# Altium PCB moveWiFi.PcbDoc
Units mil, origin at the board's own origin, x right, y up, seen from the top; angles counter-clockwise.
Board outline 2297.03 x 1980.03 mil, 2 copper layers (Top Layer, Bottom Layer); 64 components, 24 nets, 322 pads, 42 vias.
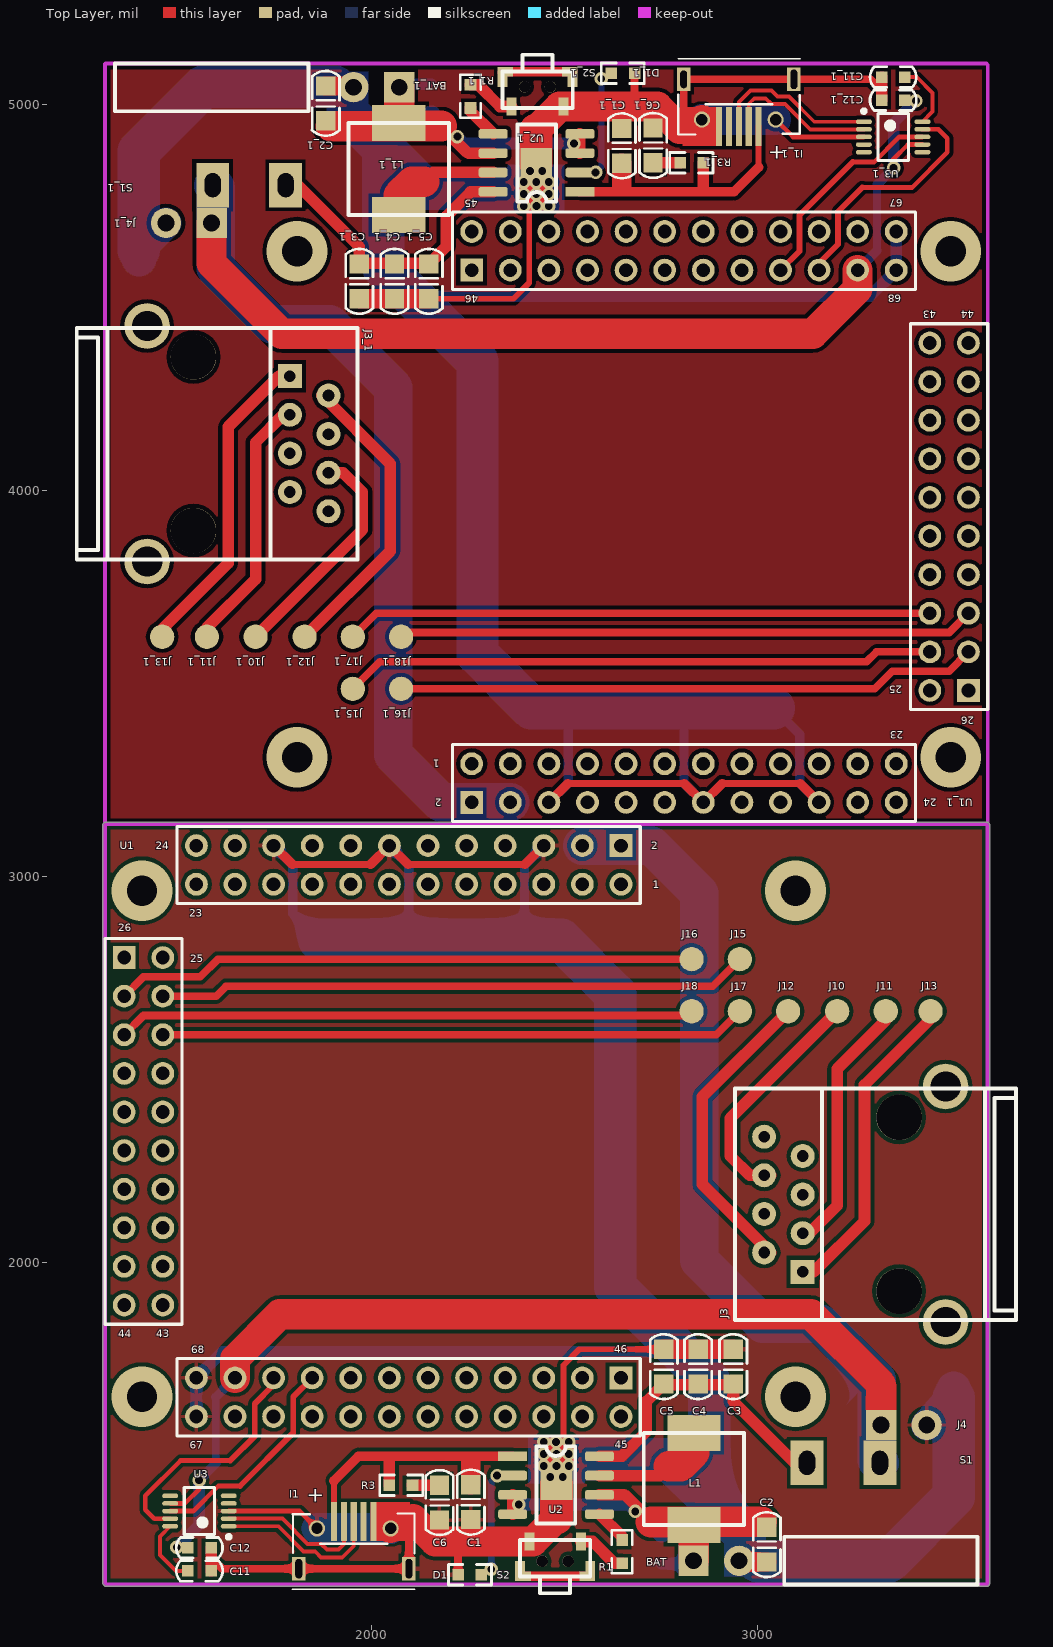
[diagram p0: Top Layer view]
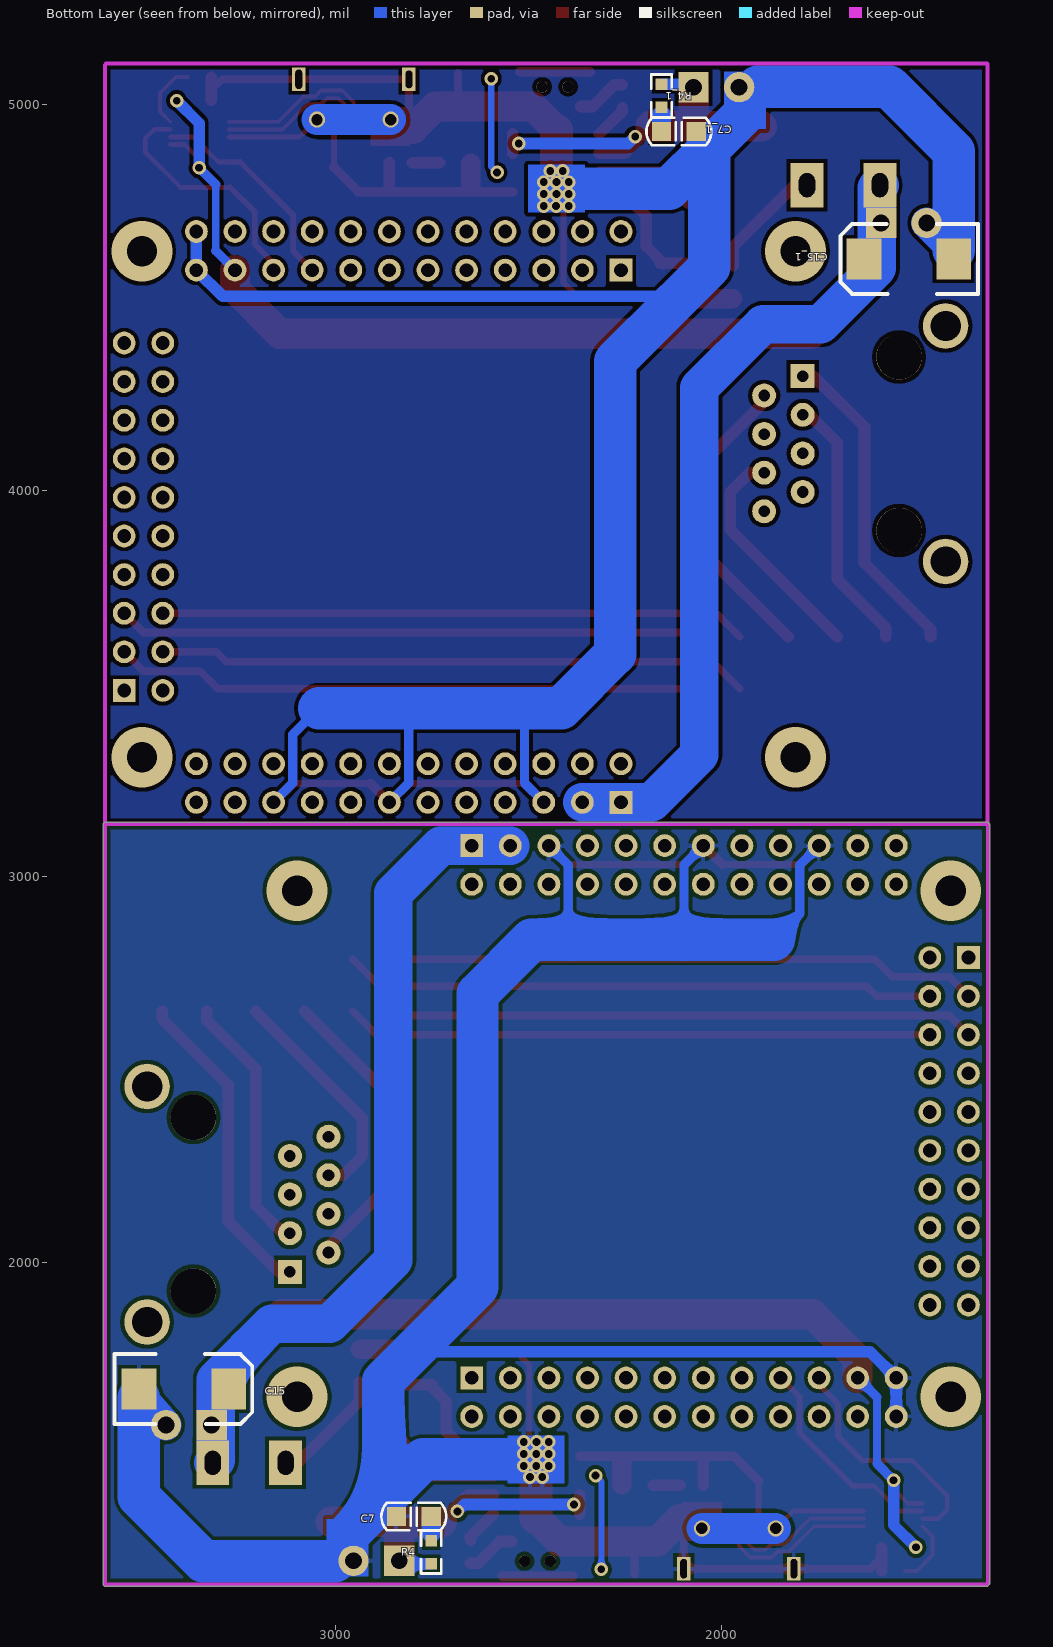
[diagram p1: Bottom Layer view, seen from below]

## Layer stack, top to bottom
Top Solder: solder mask 0.4, Solder Resist, Dk 3.5
Top Layer: signal copper 1.4
Dielectric 1: dielectric 12.6, FR-4, Dk 4.8
Bottom Layer: signal copper 1.4
Bottom Solder: solder mask 0.4, Solder Resist, Dk 3.5

## Board outline
1306.47,1164.44 cw(c1310,1168) 1304.98,1168 1304.98,3133 cw(c1310,3133) 1307.6,3137.4 cw(c1312,3135) 1312,3140.01 3595,3140.01 cw(c3595,3135) 3598.56,3138.53 3598.55,3138.55 3600.55,3136.55 3600.53,3136.56 cw(c3597,3133) 3602.01,3133 3602.01,1166 cw(c3597,1166) 3600.53,1162.44 3600.55,1162.45 3599.55,1161.45 3599.56,1161.47 cw(c3596,1165) 3596,1159.98 1313,1159.98 cw(c1313,1165) 1309.44,1161.47 1309.45,1161.45

## Design rules (kind name [scope] priority, off if disabled: settings)
Clearance [All] p1: gap=7 ignorepadtopadclearanceinfootprint=FALSE
ComponentClearance [All] p1: gap=0 collisioncheckmode=3 verticalgap=0 showdistances=FALSE
DiffPairsRouting [All] p1: maxlimit=10 minlimit=8 mostfreqgap=10 toplayer_minwidth=15 toplayer_maxwidth=15 toplayer_prefwidth=15 bottomlayer_minwidth=15 bottomlayer_maxwidth=15 bottomlayer_prefwidth=15 maxuncoupledlength=500
HoleSize [All] p1: absolutevalues=TRUE maxlimit=100 minlimit=12 maxpercent=80.000 minpercent=20.000
NetAntennae [All] p1: netantennaetolerance=10
PolygonConnect [All] p1: connectstyle=Relief reliefconductorwidth=10 reliefentries=4 polygonreliefangle="90 Angle" airgapwidth=10
RoutingVias [All] p1: holewidth=28 width=50 viastyle="Through Hole" minholewidth=28 minwidth=50 maxholewidth=28 maxwidth=50
SolderMaskExpansion [All] p1: expansion=4
Width [All] p1: maxlimit=200 minlimit=8 preferedwidth=10 minimp=50.000000 maximp=50.000000 favimp=50.000000
26 further rules are at their usual default settings.

## Classes and differential pairs
component class moveWiFi: BAT C1 C2 C3 C4 C5 C6 C7 C11 C12 C15 D1 I1 J3 J4 J10 J11 J12 J13 J15 J16 J17 J18 L1 R1 R3 R4 S1 S2 U1 U2 U3

## Components (designator, comment, footprint, x,y, rotation, side; value= is the part's Value field where it differs from the comment)
BAT "Power" "Power 2" 2835,1226 r0 top (schematic designator J2)
BAT_1 "Power" "Power 2" 2072.29,5044.12 r180 top (schematic designator J2)
C1 "Cap Semi" C0805 2258,1333 r90 top value=10uF
C1_1 "Cap Semi" C0805 2649.29,4937.12 r270 top value=10uF (schematic designator C1)
C2 "Cap Semi" C0805 3025,1223 r90 top value=10uF
C2_1 "Cap Semi" C0805 1882.29,5047.12 r270 top value=10uF (schematic designator C2)
C3 "Cap Semi" C0805 2938,1774 r270 top value=22uF
C3_1 "Cap Semi" C0805 1969.29,4496.12 r90 top value=22uF (schematic designator C3)
C4 "Cap Semi" C0805 2847,1774 r270 top value=22uF
C4_1 "Cap Semi" C0805 2060.29,4496.12 r90 top value=22uF (schematic designator C4)
C5 "Cap Semi" C0805 2758,1774 r270 top value=22uF
C5_1 "Cap Semi" C0805 2149.29,4496.12 r90 top value=22uF (schematic designator C5)
C6 "Cap Semi" C0805 2177,1332 r90 top value=10uF
C6_1 "Cap Semi" C0805 2730.29,4938.12 r270 top value=10uF (schematic designator C6)
C7 "Cap Semi" C0805 2842,1341 r180 bottom value=10uF
C7_1 "Cap Semi" C0805 2065.29,4929.12 r0 bottom value=10uF (schematic designator C7)
C11 "Cap Semi" C0603 1525,1200 r0 top value=0.1uF
C11_1 "Cap Semi" C0603 3382.29,5070.12 r180 top value=0.1uF (schematic designator C11)
C12 "Cap Semi" C0603 1585,1260 r180 top value=0.1uF
C12_1 "Cap Semi" C0603 3322.29,5010.12 r0 top value=0.1uF (schematic designator C12)
C15 "Cap Pol2" C7343 3276.72,1671 r0 bottom value=220uF
C15_1 "Cap Pol2" C7343 1630.58,4599.12 r180 bottom value=220uF (schematic designator C15)
D1 "LED2" R0603 2285,1190 r180 top
D1_1 "LED2" R0603 2622.29,5080.12 r0 top (schematic designator D1)
I1 "MicroUSB" MICROUSB#1 1955,1310 r270 top
I1_1 "MicroUSB" MICROUSB#2 2952.29,4960.12 r90 top (schematic designator I1)
J3 "RJ45-1" RG45-3 3367.92,2149.88 r270 top locked
J3_1 "RJ45-1" RG45-3 1539.37,4120.24 r90 top locked (schematic designator J3)
J4 "Power" "Power 2" 3320.89,1578 r0 top
J4_1 "Power" "Power 2" 1586.4,4692.12 r180 top (schematic designator J4)
J10 "PAD" PAD#1 3207,2642 r0 top
J10_1 "PAD" PAD#1 1700.29,3628.12 r180 top (schematic designator J10)
J11 "PAD" PAD#1 3333,2642 r0 top
J11_1 "PAD" PAD#1 1574.29,3628.12 r180 top (schematic designator J11)
J12 "PAD" PAD#2 3080,2645 r0 top
J12_1 "PAD" PAD#2 1827.29,3625.12 r180 top (schematic designator J12)
J13 "PAD" PAD#3 3449,2644 r0 top (schematic designator 13)
J13_1 "PAD" PAD#3 1458.29,3626.12 r180 top (schematic designator 13)
J15 "PAD" PAD#4 2955,2785 r0 top
J15_1 "PAD" PAD#4 1952.29,3485.12 r180 top (schematic designator J15)
J16 "PAD" PAD#4 2830,2785 r0 top
J16_1 "PAD" PAD#4 2077.29,3485.12 r180 top (schematic designator J16)
J17 "PAD" PAD#4 2955,2650 r0 top
J17_1 "PAD" PAD#4 1952.29,3620.12 r180 top (schematic designator J17)
J18 "PAD" PAD#5 2830,2655 r0 top
J18_1 "PAD" PAD#5 2077.29,3615.12 r180 top (schematic designator J18)
L1 "Inductor" L0630 2836,1557 r270 top value=1uH
L1_1 "Inductor" L0630 2071.29,4713.12 r90 top value=1uH (schematic designator L1)
R1 "Res2" R0603 2650,1220 r90 top value=10K
R1_1 "Res2" R0603 2257.29,5050.12 r270 top value=10K (schematic designator R1)
R3 "Res2" R0603 2107,1422 r180 top value=2R
R3_1 "Res2" R0603 2800.29,4848.12 r0 top value=2R (schematic designator R3)
R4 "Res2" R0603 2752,1278 r270 bottom value=2R
R4_1 "Res2" R0603 2155.29,4992.12 r90 bottom value=2R (schematic designator R4)
S1 "Switch" SWITCHA2 3317.98,1480 r270 top
S1_1 "Switch" SWITCHA2 1589.32,4790.12 r90 top (schematic designator S1)
S2 "sw-key-lie" Key_lie 2543.47,1276.18 r180 top
S2_1 "sw-key-lie" Key_lie 2363.83,4993.94 r0 top (schematic designator S2)
U1 "NanoPi NEO Core" NANOPI_NEO_CORE2 2884,3126 r270 top locked
U1_1 "NanoPi NEO Core" NANOPI_NEO_CORE2 2023.29,3144.12 r90 top locked (schematic designator U1)
U2 "IP5306" eSOP8 2480,1425 r0 top
U2_1 "IP5306" eSOP8 2427.29,4845.12 r180 top (schematic designator U2)
U3 "CH340E" MSOP-10 1555,1355 r180 top
U3_1 "CH340E" MSOP-10 3352.29,4915.12 r0 top (schematic designator U3)

## Footprints (in the part's own frame and the unit in brackets; to place one, negate y for a bottom-side part, rotate by r counter-clockwise, add the part's x,y. Pads: shape width x height; smd on the part's side, far side on the other; paste and mask are expansions set on the pad)
C0603 [mil]
  rect 30x30 smd: 1(0,0) 2(60,0)
  silkscreen extent -30,-27 90,27, body extent -1,-16 62,15, height 24
C0805 [mil]
  rect 50x50 smd: 1(0,0) 2(90,0)
  silkscreen extent -39,-36 129,36, body extent 6,-24 85,23, height 47
C7343 [mm]
  rect 2.286x2.7 smd: 1(0,0) 2(5.9,0)
  silkscreen extent -1.55,-2.3 7.5,2.3, body extent -0.86,-2.33 6.74,2.27, height 3.1
eSOP8 [mil]
  round 20 on Top Overlay: 0(-29.5,59.8)
  rect 75x25 smd: 1(-113.5,72)
  rrect50% 75x25 smd: 2(-113.5,22) 3(-113.5,-28) 4(-113.5,-78) 5(111.5,-78) 6(111.5,-28) 7(111.5,22) 8(111.5,72)
  rect 82.28x82.28 smd: 9(0,0)
  silkscreen extent -52,-102 48,98, body extent -119,-99 117,93
Key_lie [mm]
  rect 0.65x1.2 smd: 1(0,0) 2(3.4,0)
  rect 0.65x1.3 smd: ""(-0.61,1.95) ""(4.013,1.95)
  rect 0.4x0.65 smd: ""(-0.102,2.286) ""(3.505,2.286)
  round 0.75 hole 0.75: ""(0.85,1.3) ""(2.55,1.3)
  silkscreen extent -0.61,-0.1 4.03,3.4
L0630 [mm]
  rect 2.35x3.5 smd: 1(0,0) 2(6.05,0)
  silkscreen extent 0,-3.3 6.05,3.3
MICROUSB#1 [mil]
  round 42 hole 29.53 unplated: 0(0,95.47) 0(0,-95.47)
  rect 60x35 hole 17 slot 50 at 0 deg: 0(104.33,142.72) 0(104.33,-142.72)
  rect 100x15.75 smd: 1(-18,-51.47) 2(-18,-25.87) 3(-18,-0.28) 4(-18,25.31) 5(-18,50.9)
  silkscreen extent -39,-160 158,157
MICROUSB#2 [mil]
  round 42 hole 29.53 unplated: 0(0,95.47) 0(0,-95.47)
  rect 60x35 hole 17 slot 45.28 at 0 deg: 0(104.33,142.72)
  rect 60x35 hole 17 slot 50 at 0 deg: 0(104.33,-142.72)
  rect 100x15.75 smd: 1(-18,-51.47) 2(-18,-25.87) 3(-18,-0.28) 4(-18,25.31) 5(-18,50.9)
  silkscreen extent -39,-160 158,157
MSOP-10 [mm]
  oval 1.05x0.3 smd: 1(-1.925,1) 2(-1.925,0.5) 3(-1.925,0) 4(-1.925,-0.5) 5(-1.925,-1) 6(1.925,-1) 7(1.925,-0.5) 8(1.925,0) 9(1.925,0.5) 10(1.925,1)
  silkscreen extent -2.05,-1.55 1,1.82, body extent -1.4,-1.55 1.4,1.55, height 2
NANOPI_NEO_CORE2 [mm]
  round 1.5 hole 0.9: 1(3.734,-6.02) 3(3.734,-8.56) 4(1.194,-8.56) 5(3.734,-11.1) 6(1.194,-11.1) 7(3.734,-13.64) 8(1.194,-13.64) 9(3.734,-16.18) 10(1.194,-16.18) 11(3.734,-18.72) 12(1.194,-18.72) 13(3.734,-21.26) 14(1.194,-21.26) 15(3.734,-23.8) 16(1.194,-23.8) 17(3.734,-26.34) 18(1.194,-26.34) 19(3.734,-28.88) 20(1.194,-28.88) 21(3.734,-31.42) 22(1.194,-31.42) 23(3.734,-33.96) 24(1.194,-33.96) 25(8.56,-36.17) 27(11.1,-36.17) 28(11.1,-38.71) 29(13.64,-36.17) 30(13.64,-38.71) 31(16.18,-36.17) 32(16.18,-38.71) 33(18.72,-36.17) 34(18.72,-38.71) 35(21.26,-36.17) 36(21.26,-38.71) 37(23.8,-36.17) 38(23.8,-38.71) 39(26.34,-36.17) 40(26.34,-38.71) 41(28.88,-36.17) 42(28.88,-38.71) 43(31.42,-36.17) 44(31.42,-38.71) 45(38.76,-6.02) 47(38.76,-8.56) 48(36.22,-8.56) 49(38.76,-11.1) 50(36.22,-11.1) 51(38.76,-13.64) 52(36.22,-13.64) 53(38.76,-16.18) 54(36.22,-16.18) 55(38.76,-18.72) 56(36.22,-18.72) 57(38.76,-21.26) 58(36.22,-21.26) 59(38.76,-23.8) 60(36.22,-23.8) 61(38.76,-26.34) 62(36.22,-26.34) 63(38.76,-28.88) 64(36.22,-28.88) 65(38.76,-31.42) 66(36.22,-31.42) 67(38.76,-33.96) 68(36.22,-33.96)
  rect 1.5x1.5 hole 0.9: 2(1.194,-6.02) 26(8.56,-38.71) 46(36.22,-6.02)
  silkscreen extent -0.08,-39.98 40.03,-4.75
PAD#1 [mm]
  round 1.6 smd: 1(0,0.203)
PAD#2 [mm]
  round 1.6 smd: 1(0,0.127)
PAD#3 [mm]
  round 1.6 smd: 1(0,0.152)
PAD#4 [mm]
  round 1.6 smd: 1(0,0)
PAD#5 [mm]
  round 1.6 smd: 1(0,-0.127)
"Power 2" [mm]
  rect 2x2 hole 1.1: 1(0,0)
  round 2 hole 1.1: 2(3,0)
R0603 [mil]
  rect 30x30 smd: 1(0,0) 2(60,0)
  silkscreen extent -27,-27 85,27, body extent -1,-16 62,15, height 18
RG45-3 [mil]
  round 118.11 hole 78.74: 0(-305.12,120.08) 0(305.12,120.08)
  round 118.11 hole 118.11: 0(-225,0) 0(225,0)
  rect 62x62 hole 30: 1(175,-250)
  round 62 hole 30: 2(125,-350) 3(75,-250) 4(25,-350) 5(-25,-250) 6(-75,-350) 7(-125,-250) 8(-175,-350)
  silkscreen extent -300,-425 300,302, body extent -348,-543 345,401, height 573
SWITCHA2 [mil]
  rect 115x85 hole 42 slot 62 at 0 deg: 1(0,0) 2(0,-188.98)
  silkscreen extent 192,-248 315,253

## Part data
C1 C1_1 C2 C2_1 C3 C3_1 C4 C4_1 C5 C5_1 C6 C6_1 C7 C7_1 C11 C11_1 C12 C12_1: "Capacitor (Semiconductor SIM Model)", LatestRevisionDate=29-May-2009, LatestRevisionNote="IPC-7351 Footprint Added.", PackageDescription="Chip Capacitor", PackageReference=C1206, Published=8-Jun-2000, Publisher="Altium Limited"
C15 C15_1: "Polarized Capacitor (Axial)", LatestRevisionDate=17-Jul-2002, LatestRevisionNote="Re-released for DXP Platform.", PackageDescription="Polarized Capacitor; 2 Leads", PackageReference=POLAR0.8, Published=8-Jun-2000, Publisher="Altium Limited"
D1 D1_1: "Typical RED, GREEN, YELLOW, AMBER GaAs LED", LatestRevisionDate=17-Jul-2002, LatestRevisionNote="Re-released for DXP Platform.", PackageDescription="SM LED; 2 Flat Leads", PackageReference=3.2X1.6X1.1, PackageVersion=Feb-2002, Published=8-Jun-2000, Publisher="Altium Limited"
J3 J3_1: library part RJ45-3
R1 R1_1 R3 R3_1 R4 R4_1: "Resistor", LatestRevisionDate=17-Jul-2002, LatestRevisionNote="Re-released for DXP Platform.", PackageDescription="Axial Device, Thru-Hole; 2 Leads; 0.4 in Pin Spacing", PackageReference=AXIAL-0.4, Published=8-Jun-2000, Publisher="Altium Limited"
S1 S1_1: library part Switch2
U1 U1_1: library part NanoPi_NEO_Core
L1 L1_1: Code_IEC=1005, Code_JEITA=0402, LatestRevisionDate=29-May-2009, LatestRevisionNote="IPC-7351 Footprint Added.", PackageDescription="Chip Inductor", PackageReference=0402-A, Published=8-Jun-2000, Publisher="Altium Limited"

## Via types
v1: diameter 35, hole 20, Top Layer to Bottom Layer, 34 vias
v2: diameter 157.48, hole 78.74, Top Layer to Bottom Layer, 8 vias

## Nets (pads, with @x,y where several pads share a name; then routed paths per layer and width w, separated by ;. In a path a pad name is that pad's centre, name@x,y a point inside that pad or via, vN(x,y) a via of type N, cw(c..) or ccw(c..) an arc to the next point about the centre after c; other vN are vias at no path point)
GND: BAT.2 C1.1 C2.1 C3.1 C4.1 C5.1 C6.1 C7.1 C11.2 C12.1 C15.2 D1.2 I1.0 I1.5 J4.2 S2.2 U1.6 U1.14 U1.20 U1.67 U1.68 U2.9 U3.3 | length 9261.7
  Top Layer w0: C3.1@2936,1774 C3.1@2938,1772
  Top Layer w12: U3.3 1814.53,1355 I1.0@1859.53,1310
  Top Layer w15: v1(2512,1534) 2498,1548 2498,1733 2539,1774 C5.1
  Top Layer w18: 1796,3030 1998,3030 ; 2096,3030 2398,3030
  Top Layer w20: 1585,1234 1613.33,1205.67 1812.28,1205.67 2097.72,1205.67 2097.72,1323.72 2108,1334 ; D1.2 2225,1268.18 2233,1276.18
  Top Layer w24: U1.20 1796,3030 ; 1998,3030 U1.14 2096,3030 ; 2398,3030 U1.6
  Top Layer w30: C11.2 1585,1234 C12.1
  Top Layer w50: C5.1 C4.1 C3.1@2936,1774 ; BAT.2 2956.11,1223 C2.1
  Top Layer w75: I1.0@2050.47,1310 2050.47,1320.47 2064,1334 2108,1334 ; S2.2 S2.2@2419.18,1276.18
  Top Layer w78: 2108,1334 2165.82,1276.18 2233,1276.18 S2.2 ; S2.2@2419.18,1276.18 2480,1337
  Top Layer w85: 2480,1337 U2.9
  Bottom Layer w0: J4.2@3416,1578 J4.2@3427.5,1589.5
  Bottom Layer w24: U1.20 1797,3029 1797,2903 1865,2835 ; U1.14 2097,3029 2097,2835 ; 2397,2835 2397,3029 U1.6
  Bottom Layer w30: U1.67 U1.68 1615,1768 2766,1768 2783,1785
  Bottom Layer w80: I1.0@1859.53,1310 I1.0@2050.47,1310 ; J4.2 C15.2@3509,1648
  Bottom Layer w90: C15.2@3509,1648 C15.2
  Bottom Layer w110: 1865,2835 2097,2835 2397,2835 2492,2835 2632,2695 2632,1936 2783,1785 2876,1692 2876,1385 ; 2532,1489 2772,1489 2876,1385 ; 2968,1293 2876,1385 ; 3002,1225 3342,1225 3509,1392 C15.2@3509,1648
  other v1: 2464,1443 2496,1443 2447,1472 2480,1472 2512,1472 2447,1503 2480,1503 2512,1503 2447,1534 2479,1534
LAN_RX+: J17.1 U1.29 | length 1520.3
  Top Layer w20: U1.29 2894,2589 J17.1
LAN_RX-: J18.1 U1.30 | length 1495.3
  Top Layer w20: U1.30 1410,2639 2819,2639 J18.1
LAN_TX+: J15.1 U1.27 | length 1534.8
  Top Layer w20: U1.27 1598,2689 1624,2715 2885,2715 J15.1
LAN_TX-: J16.1 U1.28 | length 1509.8
  Top Layer w20: U1.28 1410,2739 1557,2739 1603,2785 J16.1
Net13_1: J3.1 J13.1 | length 812.3
  Top Layer w30: J3.1@3135,1974.61 3146.61,1974.61 3278,2106 3278,2459 3449,2630 J13.1
NetC1_2: C1.2 I1.1 R3.2 U2.1 | length 725.8
  Top Layer w16: I1.1 1903.53,1433.53
  Top Layer w25: 1903.53,1433.53 1967,1497 ; 1971,1497 2056,1497 ; 2052,1497 U2.1
  Top Layer w30: R3.2 2047,1492
  Top Layer w50: C1.2 2258,1484
NetC2_2: BAT.1 C2.2 L1.2 R4.2 U2.3 U2.4 U2.6 | length 1029
  Top Layer w0: C2.2@3012,1327 C2.2@3025,1314
  Top Layer w30: U2.4 U2.3 ; U2.6@2590.5,1397 U2.6 ; U2.6@2594.5,1397 2655,1397 ; 2660,1395 2727,1328 ; 2725,1330 2725,1327 2726,1326
  Top Layer w50: BAT.1@2826,1217 BAT.1
  Top Layer w79: BAT.1 2835,1326 2836,1327 C2.2@3012,1327
  Top Layer w80: 2725,1327 L1.2@2836,1327 ; L1.2@2835,1326 L1.2@2838,1326
  Bottom Layer w30: v1(2382,1372) 2666,1372 v1(2684,1354) ; R4.2 2827,1218 BAT.1
NetC3_2: C3.2 C4.2 C5.2 S1.2 U2.8 | length 770.9
  Top Layer w30: U2.8 2649,1497 ; 2650,1497 2649,1497 ; C5.2@2749,1682 C5.2@2756,1682 ; C3.2@2927,1682 C5.2@2760,1682 ; 2938,1639 S1.2@3096,1481 ; 2938,1644 C3.2 C3.2@2938,1688 ; S1.2@3096,1480 S1.2@3128.02,1480 ; 2649,1497 2713,1561 2713,1639 C5.2@2756,1682 ; C5.2@2756,1682 C5.2@2760,1682 ; C5.2@2756,1682 C5.2 C5.2@2760,1682
NetC6_2: C6.2 R3.1 | length 70
  Top Layer w30: R3.1 C6.2
NetC7_2: C7.2 R4.1 | length 42
  Bottom Layer w50: 2752,1299 C7.2
NetC11_1: C11.1 U3.10 | length 174.5
  Top Layer w10: U3.10 1453,1289.42 1453,1241 1494,1200 C11.1
NetC12_2: C12.2 C15.1 J4.1 S1.1 U1.2 U1.4 U1.66 U3.7 | length 4677.4
  Top Layer w12: U3.7 1516.68,1374.68 1554,1412 v1(1554,1435)
  Top Layer w78: U1.66 1647,1749 1763,1865 3139,1865 3320.89,1683.11 J4.1
  Bottom Layer w20: 1597,1478 1597,1650
  Bottom Layer w24: v1(1554,1435) 1597,1478 ; 1597,1650 U1.66
  Bottom Layer w30: v1(1496,1261) 1554,1319 v1(1554,1435)
  Bottom Layer w100: U1.4 U1.2 2727,3079 2850,2956 2850,2005 3015,1840 3165,1840 3310,1695 3310,1578 3310,1487 S1.1@3317,1480
NetD1_1: D1.1 U2.2 | length 249.2
  Bottom Layer w16: v1(2311,1204) 2311,1432 v1(2326,1447)
NetJ3_2: J3.2 J12.1 | length 790.7
  Top Layer w30: J3.2@3035,2024.61 2858,2201.61 2858,2428 J12.1
NetJ3_3: J3.3 J11.1 | length 657.4
  Top Layer w30: J3.3@3135,2074.61 3207,2146.61 3207,2501 3333,2627 J11.1
NetJ3_6: J3.6 J10.1 | length 615.6
  Top Layer w30: J3.6@3035,2224.61 2980.39,2224.61 2930,2275 2930,2373 J10.1
NetL1_1: L1.1 U2.7 | length 321.7
  Top Layer w30: U2.7@2591.5,1446 2747,1446 ; 2747,1447 2771,1471 ; 2836,1505 L1.1@2836,1558.19
  Top Layer w80: 2771,1471 2802,1471 ; 2802,1472 2836,1506
NetR1_1: R1.1 S2.1 | length 129.8
  Top Layer w30: S2.1 2573.82,1276.18 2630,1220 R1.1
NetR1_2: R1.2 U2.5 | length 91.2
  Top Layer w30: U2.5 2650,1288.5 R1.2
RXD0: U1.62 U3.8 | length 568.2
  Top Layer w12: U3.8 1539,1355 1604,1420 1660,1420
  Top Layer w15: 1660,1420 1798,1558 1798,1651 U1.62 U1.62@1847,1697
TXD0: U1.64 U3.9 | length 628.7
  Top Layer w12: U3.9 1437.69,1335.31 1415,1358 1415,1395 1506,1486 1635,1486
  Top Layer w15: 1635,1486 1698,1549 1698,1633 1747,1682 U1.64
UD+: I1.3 U3.1 | length 432.9
  Top Layer w10: U3.1 1759.37,1315.63 1825,1250 1855,1250 1870,1235 1925,1235 1954.72,1264.72 I1.3
UD-: I1.2 U3.2 | length 396.3
  Top Layer w10: U3.2 1769.69,1335.31 1835,1270 1870,1270 1885,1255 1915,1255 1929.13,1269.13 I1.2
pads on no net: BAT_1.1 BAT_1.2 C1_1.1 C1_1.2 C2_1.1 C2_1.2 C3_1.1 C3_1.2 C4_1.1 C4_1.2 C5_1.1 C5_1.2 C6_1.1 C6_1.2 C7_1.1 C7_1.2 C11_1.1 C11_1.2 C12_1.1 C12_1.2 C15_1.1 C15_1.2 D1_1.1 D1_1.2 I1.4 I1_1.0 I1_1.1 I1_1.2 I1_1.3 I1_1.4 I1_1.5 J3.0 J3.4 J3.5 J3.7 J3.8 J3_1.0 J3_1.1 J3_1.2 J3_1.3 J3_1.4 J3_1.5 J3_1.6 J3_1.7 J3_1.8 J4_1.1 J4_1.2 J10_1.1 J11_1.1 J12_1.1 J13_1.1 J15_1.1 J16_1.1 J17_1.1 J18_1.1 L1_1.1 L1_1.2 R1_1.1 R1_1.2 R3_1.1 R3_1.2 R4_1.1 R4_1.2 S1_1.1 S1_1.2 S2. S2_1. S2_1.1 S2_1.2 U1.1 U1.3 U1.5 U1.7 U1.8 U1.9 U1.10 U1.11 U1.12 U1.13 U1.15 U1.16 U1.17 U1.18 U1.19 U1.21 U1.22 U1.23 U1.24 U1.25 U1.26 U1.31 U1.32 U1.33 U1.34 U1.35 U1.36 U1.37 U1.38 U1.39 U1.40 U1.41 U1.42 U1.43 U1.44 U1.45 U1.46 U1.47 U1.48 U1.49 U1.50 U1.51 U1.52 U1.53 U1.54 U1.55 U1.56 U1.57 U1.58 U1.59 U1.60 U1.61 U1.63 U1.65 U1_1.1 U1_1.2 U1_1.3 U1_1.4 U1_1.5 U1_1.6 U1_1.7 U1_1.8 U1_1.9 U1_1.10 U1_1.11 U1_1.12 U1_1.13 U1_1.14 U1_1.15 U1_1.16 U1_1.17 U1_1.18 U1_1.19 U1_1.20 U1_1.21 U1_1.22 U1_1.23 U1_1.24 U1_1.25 U1_1.26 U1_1.27 U1_1.28 U1_1.29 U1_1.30 U1_1.31 U1_1.32 U1_1.33 U1_1.34 U1_1.35 U1_1.36 U1_1.37 U1_1.38 U1_1.39 U1_1.40 U1_1.41 U1_1.42 U1_1.43 U1_1.44 U1_1.45 U1_1.46 U1_1.47 U1_1.48 U1_1.49 U1_1.50 U1_1.51 U1_1.52 U1_1.53 U1_1.54 U1_1.55 U1_1.56 U1_1.57 U1_1.58 U1_1.59 U1_1.60 U1_1.61 U1_1.62 U1_1.63 U1_1.64 U1_1.65 U1_1.66 U1_1.67 U1_1.68 U2.0 U2_1.0 U2_1.1 U2_1.2 U2_1.3 U2_1.4 U2_1.5 U2_1.6 U2_1.7 U2_1.8 U2_1.9 U3.4 U3.5 U3.6 U3_1.1 U3_1.2 U3_1.3 U3_1.4 U3_1.5 U3_1.6 U3_1.7 U3_1.8 U3_1.9 U3_1.10
copper on no net: | length 28870.5
  Top Layer w0: 1882.29,4956.12 1895.29,4943.12 ; 1969.29,4498.12 1971.29,4496.12
  Top Layer w10: 2952.58,4942.12 2952.58,5005.4 2982.29,5035.12 3037.29,5035.12 3052.29,5020.12 3082.29,5020.12 3147.92,4954.49 3276.51,4954.49 ; 2978.17,4942.12 2978.17,5000.99 2992.29,5015.12 3022.29,5015.12 3037.29,5000.12 3072.29,5000.12 3137.61,4934.8 3276.51,4934.8 ; 3382.29,5070.12 3413.29,5070.12 3454.29,5029.12 3454.29,4980.7 3428.08,4954.49
  Top Layer w12: 3047.77,4960.12 3092.77,4915.12 3276.51,4915.12 ; 3247.29,4850.12 3303.29,4850.12 3368.29,4915.12 3428.08,4915.12 ; 3272.29,4784.12 3401.29,4784.12 3492.29,4875.12 3492.29,4912.12 3469.61,4934.8 3428.08,4934.8 ; v1(3353.29,4835.12) 3353.29,4858.12 3390.61,4895.43 3428.08,4895.43
  Top Layer w15: 2149.29,4496.12 2368.29,4496.12 2409.29,4537.12 2409.29,4722.12 v1(2395.29,4736.12) ; 3060.29,4573.12 3060.29,4570.12 3109.29,4619.12 3109.29,4712.12 3247.29,4850.12 ; 3160.29,4570.12 3160.29,4588.12 3209.29,4637.12 3209.29,4721.12 3272.29,4784.12
  Top Layer w16: 3003.76,4836.58 3003.76,4942.12
  Top Layer w18: 2509.29,3240.12 2811.29,3240.12 ; 2909.29,3240.12 3111.29,3240.12
  Top Layer w20: 1952.29,3485.12 2022.29,3555.12 3283.29,3555.12 3309.29,3581.12 3447.29,3581.12 ; 1952.29,3620.12 2013.29,3681.12 3447.29,3681.12 ; 2077.29,3485.12 3304.29,3485.12 3350.29,3531.12 3497.29,3531.12 3547.29,3581.12 ; 2077.29,3620.12 2088.29,3631.12 3497.29,3631.12 3547.29,3681.12 ; 2674.29,4993.94 2682.29,5001.94 2682.29,5080.12 ; 2799.29,4936.12 2809.58,4946.4 2809.58,5064.45 3095.01,5064.45 3293.96,5064.45 3322.29,5036.12
  Top Layer w24: 2460.29,3191.12 2509.29,3240.12 ; 2811.29,3240.12 2860.29,3191.12 2909.29,3240.12 ; 3111.29,3240.12 3160.29,3191.12
  Top Layer w25: 2340.29,5083.12 2341.11,5083.94 2522.29,5083.94 ; 2385,1186.18 2566.18,1186.18 2567,1187 ; 2540.79,4773.12 2855.29,4773.12 ; 2851.29,4773.12 2936.29,4773.12 ; 2940.29,4773.12 3003.76,4836.58
  Top Layer w30: 1458.29,3620.12 1458.29,3640.12 1629.29,3811.12 1629.29,4164.12 1760.69,4295.51 1772.29,4295.51 ; 1574.29,3620.12 1574.29,3643.12 1700.29,3769.12 1700.29,4123.51 1772.29,4195.51 ; 1700.29,3620.12 1977.29,3897.12 1977.29,3995.12 1926.9,4045.51 1872.29,4045.51 ; 1779.27,4790.12 1810.29,4790.12 1969.29,4631.12 ; 1827.29,3620.12 2049.29,3842.12 2049.29,4068.51 1872.29,4245.51 ; 1969.29,4582.12 1969.29,4586.12 1969.29,4626.12 ; 1980.29,4588.12 2147.29,4588.12 ; 2071.29,4711.93 2071.29,4765.12 ; 2136.29,4799.12 2160.29,4823.12 ; 2158.29,4588.12 2151.29,4588.12 ; 2160.29,4824.12 2315.79,4824.12 ; 2180.29,4942.12 2247.29,4875.12 ; 2181.29,4944.12 2182.29,4943.12 2182.29,4940.12 ; 2252.29,4873.12 2312.79,4873.12 ; 2257.29,4773.12 2258.29,4773.12 ; 2257.29,4990.12 2257.29,4981.62 2315.79,4923.12 ; 2257.29,5050.12 2277.29,5050.12 2333.47,4993.94 2363.83,4993.94 ; 2315.79,4773.12 2258.29,4773.12 ; 2315.79,4873.12 2316.79,4873.12 ; 2540.79,4873.12 2540.79,4923.12 ; 2730.29,4848.12 2800.29,4848.12 ; 2860.29,4778.12 2860.29,4848.12 ; 3322.29,5010.12 3322.29,5036.12 3322.29,5070.12 ; 2147.29,4588.12 2149.29,4586.12 2151.29,4588.12 ; 2147.29,4588.12 2151.29,4588.12 ; 2151.29,4588.12 2194.29,4631.12 2194.29,4709.12 2258.29,4773.12
  Top Layer w50: 1882.29,5047.12 1951.18,5047.12 1954.18,5044.12 ; 1971.29,4496.12 2060.29,4496.12 2149.29,4496.12 ; 2072.29,5044.12 2081.29,5053.12 ; 2649.29,4786.12 2649.29,4847.12
  Top Layer w75: 2488.11,4993.94 2497.69,4993.94 ; 2799.29,4936.12 2843.29,4936.12 2856.82,4949.65 2856.82,4960.12
  Top Layer w78: 1586.4,4692.12 1586.4,4587.01 1768.29,4405.12 3144.29,4405.12 3260.29,4521.12 3260.29,4570.12 ; 2427.29,4933.12 2488.11,4993.94 ; 2497.69,4993.94 2674.29,4993.94 2741.47,4993.94 2799.29,4936.12
  Top Layer w79: 1895.29,4943.12 2071.29,4943.12 2072.29,4944.12 2072.29,5044.12
  Top Layer w80: 2069.29,4944.12 2072.29,4944.12 ; 2071.29,4764.12 2105.29,4798.12 ; 2071.29,4943.12 2182.29,4943.12 ; 2105.29,4799.12 2136.29,4799.12
  Top Layer w85: 2427.29,4845.12 2427.29,4933.12
  Bottom Layer w0: 1479.79,4680.62 1491.29,4692.12
  Bottom Layer w16: v1(2581.29,4823.12) 2596.29,4838.12 v1(2596.29,5066.12)
  Bottom Layer w20: 3310.29,4620.12 3310.29,4792.12
  Bottom Layer w24: 2460.29,3191.12 2510.29,3241.12 2510.29,3435.12 ; 2810.29,3435.12 2810.29,3241.12 2860.29,3191.12 ; 3042.29,3435.12 3110.29,3367.12 3110.29,3241.12 3160.29,3191.12 ; 3260.29,4570.12 3310.29,4620.12 ; 3310.29,4792.12 v1(3353.29,4835.12)
  Bottom Layer w30: 2072.29,5044.12 2080.29,5052.12 2155.29,5052.12 ; 2124.29,4485.12 2141.29,4502.12 3292.29,4502.12 3360.29,4570.12 3360.29,4670.12 ; v1(2223.29,4916.12) 2241.29,4898.12 v1(2525.29,4898.12) ; v1(3353.29,4835.12) 3353.29,4951.12 v1(3411.29,5009.12)
  Bottom Layer w50: 2155.29,4929.12 2155.29,4971.12
  Bottom Layer w80: 1398.29,4622.12 1468.29,4692.12 ; 2856.82,4960.12 3047.77,4960.12
  Bottom Layer w90: 1398.29,4599.12 1398.29,4622.12
  Bottom Layer w100: 1590.29,4790.12 1597.29,4783.12 1597.29,4692.12 1597.29,4575.12 1742.29,4430.12 1892.29,4430.12 2057.29,4265.12 2057.29,3314.12 2180.29,3191.12 2260.29,3191.12 2360.29,3191.12
  Bottom Layer w110: 1398.29,4622.12 1398.29,4878.12 1565.29,5045.12 1905.29,5045.12 ; 1939.29,4977.12 2031.29,4885.12 ; 2375.29,4781.12 2135.29,4781.12 2031.29,4885.12 ; 3042.29,3435.12 2810.29,3435.12 2510.29,3435.12 2415.29,3435.12 2275.29,3575.12 2275.29,4334.12 2124.29,4485.12 2031.29,4578.12 2031.29,4885.12
  other v1: 2428.29,4736.12 2460.29,4736.12 2395.29,4767.12 2427.29,4767.12 2460.29,4767.12 2395.29,4798.12 2427.29,4798.12 2460.29,4798.12 2411.29,4827.12 2443.29,4827.12
  other v2: 1406,1651.25 3099.37,1651.25 1406,2962.28 3099.37,2962.28 1807.92,3307.84 3501.29,3307.84 1807.92,4618.87 3501.29,4618.87

## Polygon pours and split planes (outlines as drawn)
no net on Top Layer "NONET_L01_P028" (solid, pour order 28): 1310.29,3137.12 1310.29,5104.12 1312.29,5102.12 3597.29,5102.12 3597.29,3137.12
GND on Top Layer "GND_L01_P010" (solid, pour order 10): 3597,3133 3597,1166 3595,1168 1310,1168 1310,3133
no net on Top Layer "Top Layer-No Net 1" (solid, pour order 34): 2907.29,4890.12
no net on Top Layer "Top Layer-No Net" (solid, pour order 32): 2907.29,4890.12
no net on Top Layer "Top Layer-No Net 2" (solid, pour order 30): 3595.29,3135.12
no net on Top Layer "Top Layer-No Net 2" (solid, pour order 6): 1312,3135
no net on Top Layer "Top Layer-No Net" (solid, pour order 2): 2000,1380
no net on Top Layer "Top Layer-No Net 1" (solid, pour order 0): 2000,1380
GND on Bottom Layer "GND_L02_P038" (solid, pour order 38): 1310.29,5104.12 1312.29,5102.12 3597.29,5102.12 3597.29,3137.29 3595,3135 3594.88,3135.12 1312.29,3135.12 1312.29,5104.12 1311.29,5105.12
GND on Bottom Layer "GND_L02_P036" (solid, pour order 36): 1312,3135 3595,3135 3595,1166 3593,1168 1310,1168 1310,3133

## Keep-outs
Keep-Out Layer:
  lines w10: 1310,3133 1310,1168 1313,1165 3596,1165 3597,1166 3597,3133 3595,3135 1312,3135 ; 3595.29,3135.12 1312.29,3135.12 1310.29,3137.12 1310.29,5104.12 1311.29,5105.12 3594.29,5105.12 3597.29,5102.12 3597.29,3137.12

## Other copper
Top Layer:
  region: 2909.29,4992.12 2806.29,4992.12 2806.29,4892.12 2909.29,4892.12
  region: 2470.29,4804.12 2382.29,4804.12 2382.29,4724.12 2470.29,4724.12
  rectangle net GND: 2437,1466 2525,1546
  rectangle net GND: 1998,1278 2101,1378
Bottom Layer:
  region: 2501.29,4843.12 2353.29,4843.12 2353.29,4719.12 2501.29,4719.12
  region: 1993.29,5084.12 1884.29,5084.12 1884.29,4935.12 1993.29,4935.12
  rectangle net GND: 2914,1186 3023,1335
  rectangle net GND: 2406,1427 2554,1551

## Silkscreen, mask and mechanical layers (free items; w line width, h text height)
Top Solder:
  region: 2906.29,4916.12 2859.29,4916.12 2859.29,4888.12 2906.29,4888.12
  rectangle: 2001,1354 2048,1382
  lines w16: 1903.53,1328 1903.53,1433.53 ; 3003.76,4836.58 3003.76,4942.12
  lines w25: 1903.53,1433.53 1967,1497 2052,1497 2366.5,1497 ; 2540.79,4773.12 2855.29,4773.12 2940.29,4773.12 3003.76,4836.58
  lines w30: 1811.29,4790.12 1969.29,4632.12 1969.29,4588.12 2147.29,4588.12 ; 2149.29,4587.12 2194.29,4632.12 2194.29,4710.12 2257.29,4773.12 2315.79,4773.12 ; 2160.29,4823.12 2315.79,4823.12 ; 2182.29,4940.12 2249.29,4873.12 ; 2252.29,4873.12 2315.79,4873.12 ; 2591.5,1397 2655,1397 ; 2591.5,1447 2747,1447 ; 2591.5,1497 2650,1497 2713,1560 2713,1638 2758,1683 ; 2658,1397 2725,1330 ; 2760,1682 2938,1682 2938,1638 3096,1480
  lines w80: 2071.29,4765.12 2105.29,4799.12 2136.29,4799.12 ; 2072.29,4944.12 2176.29,4944.12 ; 2731,1326 2835,1326 ; 2771,1471 2802,1471 2836,1505

## Text inside footprints (layer, text, board x,y; h text height)
I1: Top Overlay "+" at 1833,1379 h39.37
I1_1: Top Overlay "+" at 3074.29,4891.12 h39.37 r180
U1: Top Overlay "67" at 1530,1517 h20; Top Overlay "68" at 1534,1764 h20; Top Overlay "45" at 2631,1518 h20; Top Overlay "46" at 2630,1765 h20; Top Overlay "43" at 1443,1805 h20; Top Overlay "44" at 1345,1805 h20; Top Overlay "26" at 1345,2857 h20; Top Overlay "25" at 1531,2777 h20; Top Overlay "2" at 2725,3070 h20; Top Overlay "1" at 2730,2968 h20; Top Overlay "24" at 1442,3070 h20; Top Overlay "23" at 1529,2895 h20
U1_1: Top Overlay "23" at 3378.29,3375.12 h20 r180; Top Overlay "24" at 3465.29,3200.12 h20 r180; Top Overlay "1" at 2177.29,3302.12 h20 r180; Top Overlay "2" at 2182.29,3200.12 h20 r180; Top Overlay "25" at 3376.29,3493.12 h20 r180; Top Overlay "26" at 3562.29,3413.12 h20 r180; Top Overlay "44" at 3562.29,4465.12 h20 r180; Top Overlay "43" at 3464.29,4465.12 h20 r180; Top Overlay "46" at 2277.29,4505.12 h20 r180; Top Overlay "45" at 2276.29,4752.12 h20 r180; Top Overlay "68" at 3373.29,4506.12 h20 r180; Top Overlay "67" at 3377.29,4753.12 h20 r180